# EAGLE board BMS-HVver3 (EAGLE 6.6.0), part 1 of 2
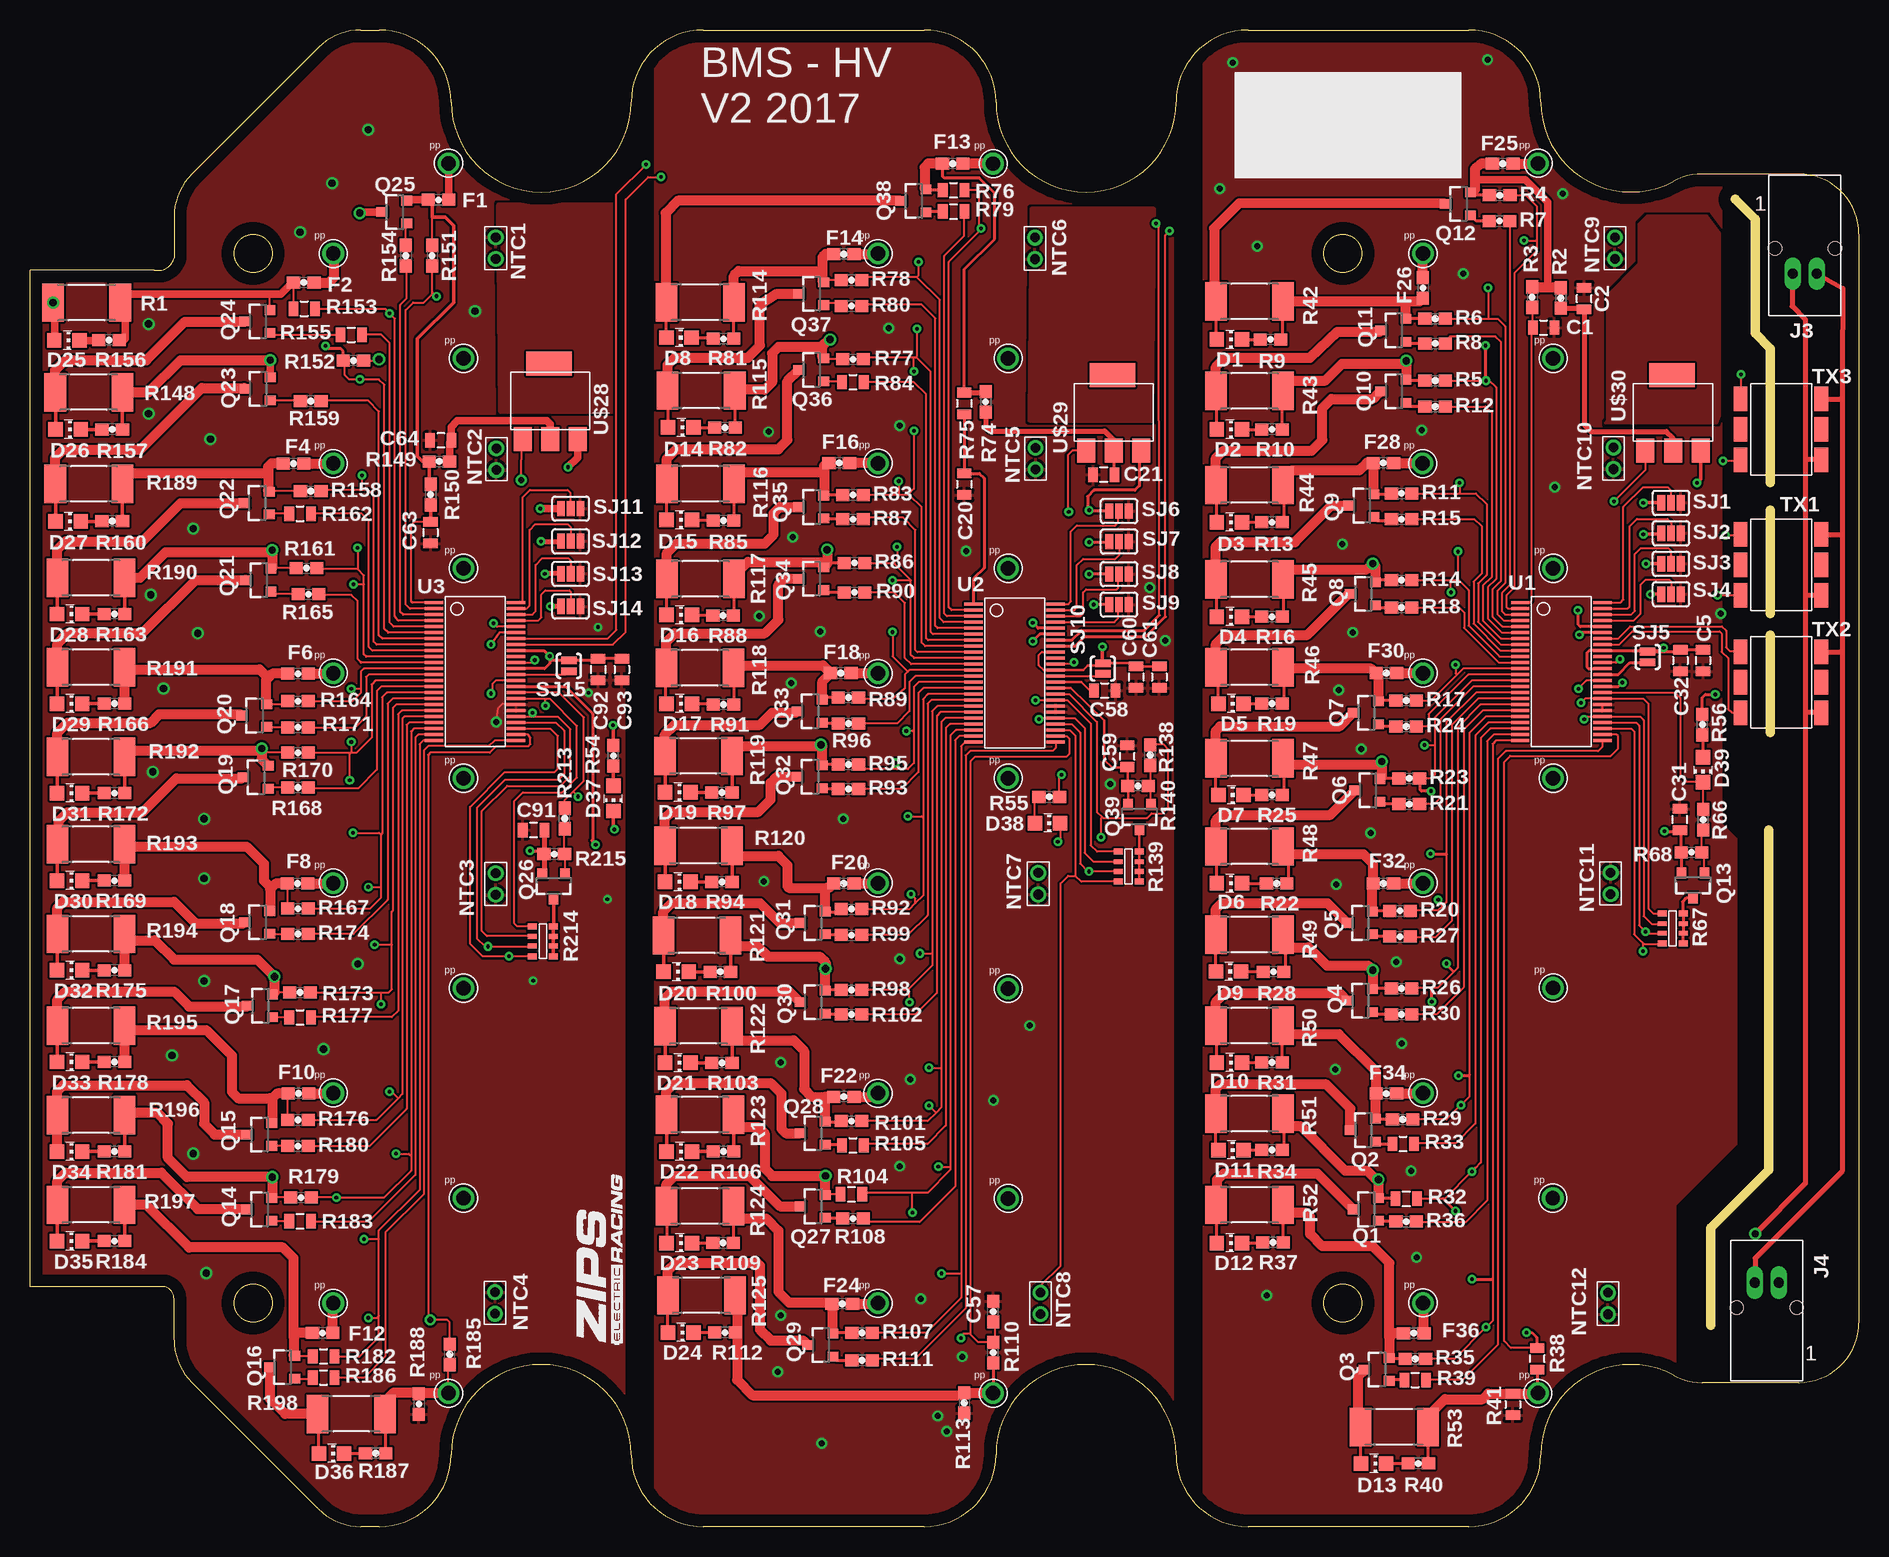
[diagram p0: board, top side]
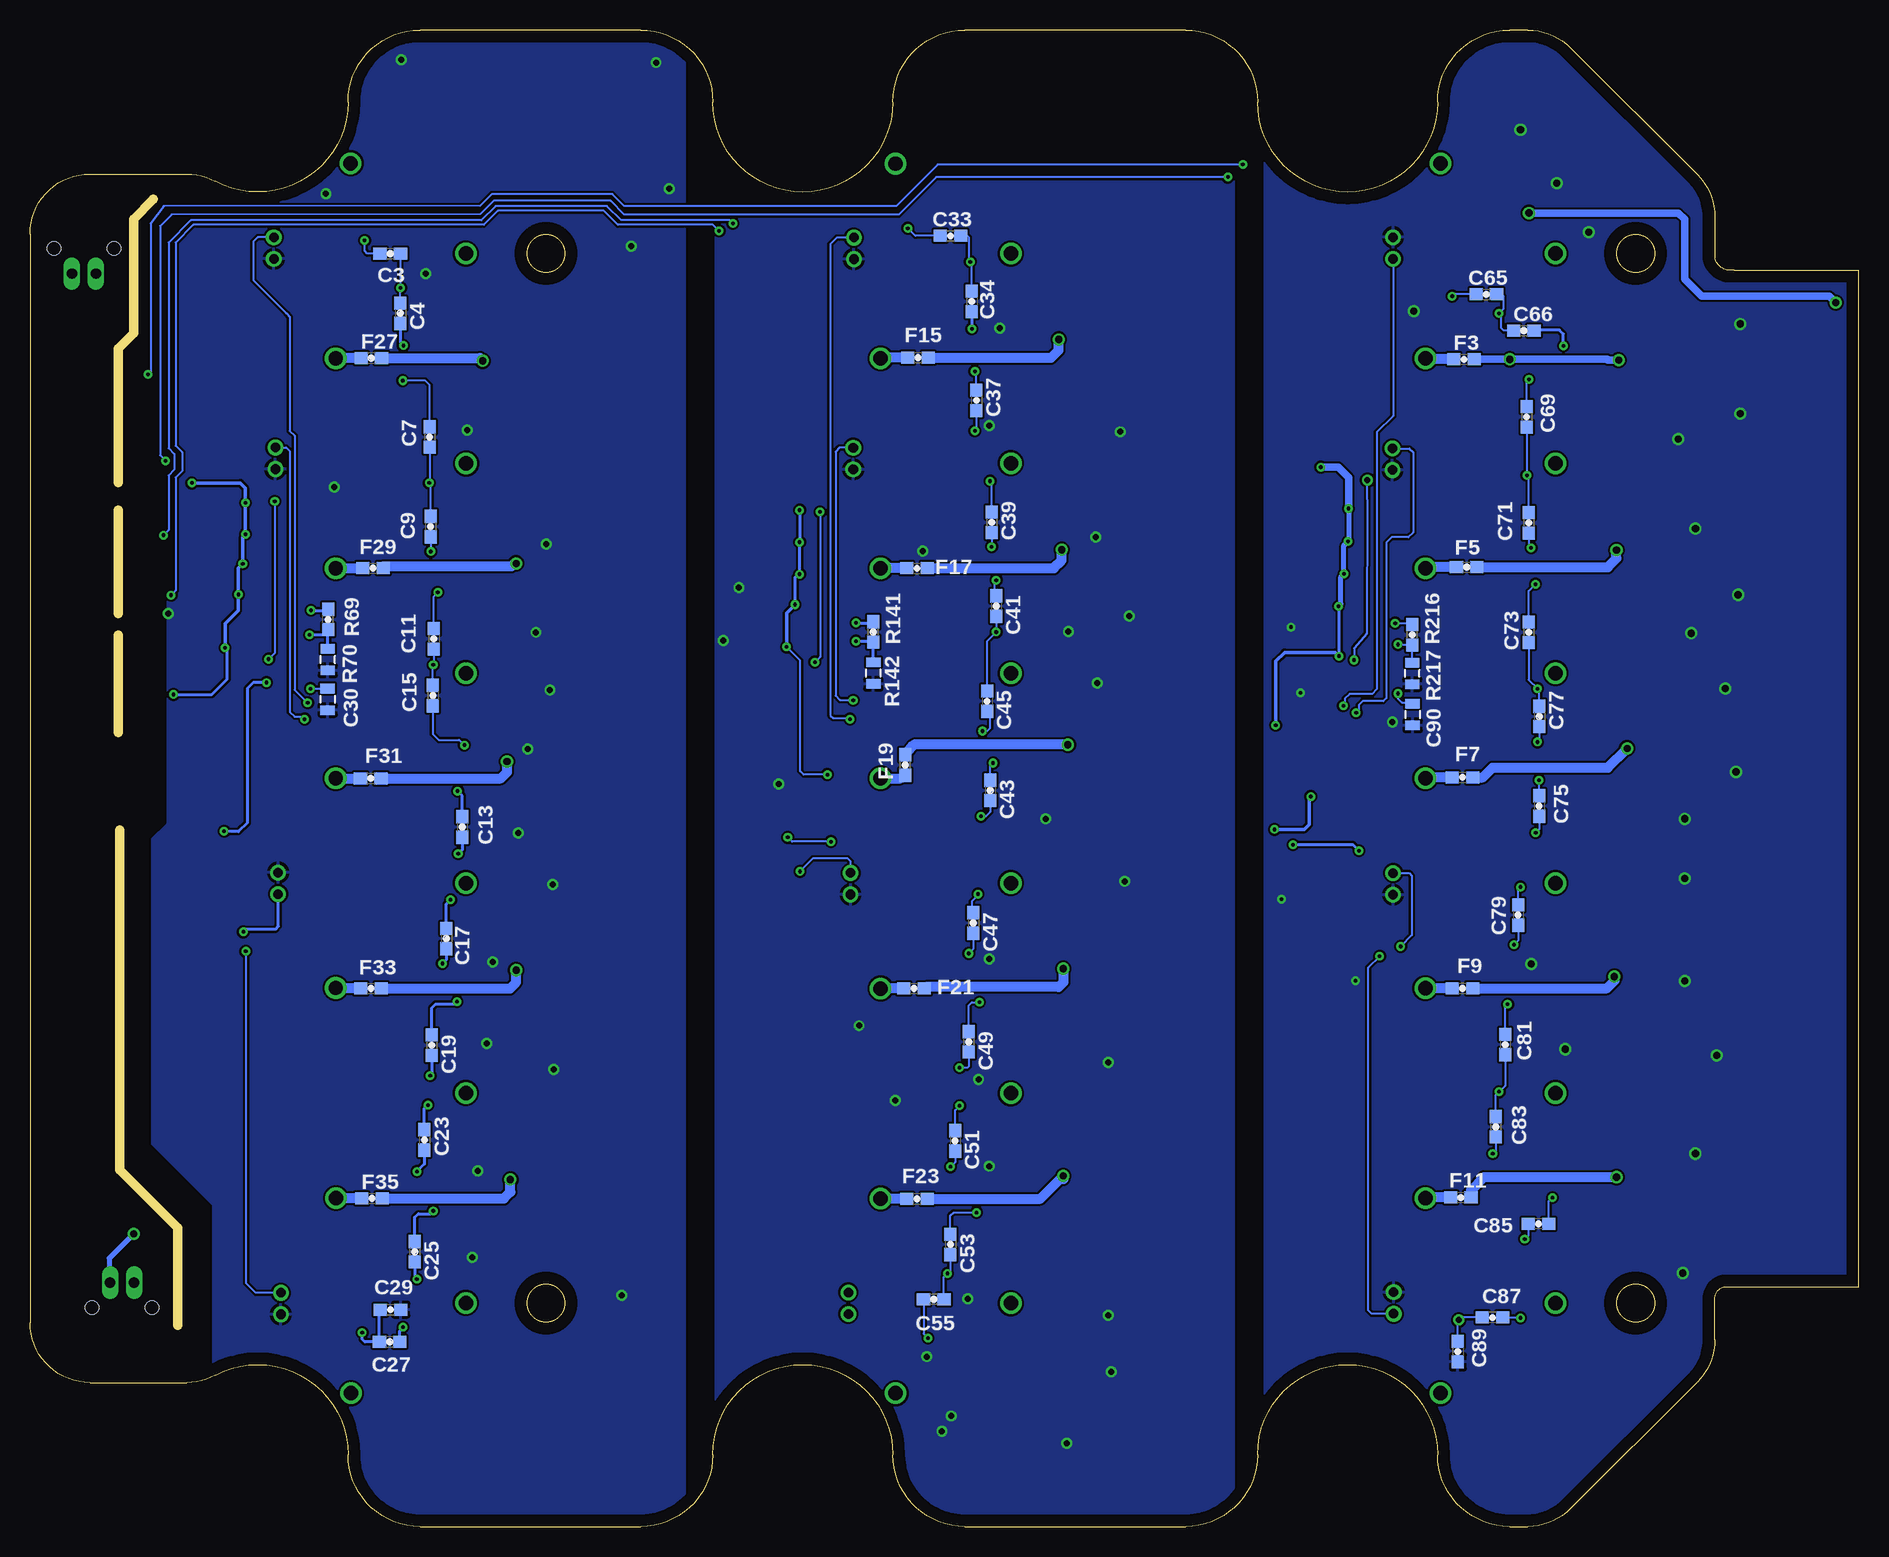
[diagram p1: board, bottom side, seen from below]

Size 152.4 x 124.75 mm. Coordinates in mm from the lower left corner, seen from the top.
Outline: 145.03,87.01 145.03,98.19 143.76,99.46 143.76,108.98 142.11,110.63
Outline: 145.03,84.73 145.03,76.09
Outline: 145.03,74.31 145.03,66.19
Outline: 140.08,16.78 140.08,24.91 144.91,29.74 144.91,58.06
Outline: 152.4,107.75 152.4,17 arc-90 147.4,12 139.34,12 arc-28 136.96,12.6 arc118 125.9,6 arc-90 119.9,0 101.5,0 arc-90 95.5,6 arc180 80.5,6 arc-90 74.5,0 56.1,0 arc-90 50.1,6 arc180 35.1,6 arc-90 29.1,0 27.57,0 arc-45 24.04,1.46 13.46,12.03 arc-45 12,15.57 12,19 arc90 11,20 0,20 0,104.75 10.37,104.75 arc90 12,105.75 12,109.18 arc-45 13.46,112.72 24.04,123.29 arc-45 27.57,124.75 29.1,124.75 arc-90 35.1,118.75 arc180 50.1,118.75 arc-90 56.1,124.75 74.5,124.75 arc-90 80.5,118.75 arc180 95.5,118.75 arc-90 101.5,124.75 119.9,124.75 arc-90 125.9,118.75 arc118 136.96,112.15 arc-28 139.34,112.75 147.4,112.75 arc-90 152.4,107.75
Outline: circle at 109.4,106.12 radius 1.59
Outline: circle at 109.4,18.62 radius 1.59
Outline: circle at 18.6,18.62 radius 1.59
Outline: circle at 18.6,106.12 radius 1.59
Copper layers (1*16): Top 0.035mm / dielectric 1.5mm / Bottom 0.035mm
Design rules "default *": minimum track width 7mil, minimum drill 12mil, track to track 7mil, track to pad 7mil, pad to pad 7mil, via to via 7mil, smd to smd 7mil, copper to edge 40mil, drill to drill 8mil, minimum pad ring 10mil, minimum via ring 8mil, stop-mask expansion 4mil, vias tented up to drill 0mil, thermal gap 10mil

## Footprints (pad centres in the part's own frame; a part is rotated, then mirrored left to right if it is on the bottom)
0805 = smd 0.8 x 1.2: 1 -0.9,0; 2 0.9,0
0603 = smd 1.1 x 1: 1 -0.85,0; 2 0.85,0
CHIP_LED0805 = smd 1.2 x 1.2: A 0,-1.05; C 0,1.05
S02B-PASK-2(LF)(SN) = drill 0.85 long: 1 -1,0; 2 1,0 | hole 1.1: -2.5,2.1; 2.5,2.1
103JT-025 = drill 0.8: 1 -0.9,0; 2 0.9,0
SOT23 = smd 0.8 x 0.9: 1 -0.95,-1; 2 0.95,-1; 3 0,1.1
R2512 = smd 1.8 x 3.2: 1 -2.8,0; 2 2.8,0
MNR14 = smd 0.5 x 0.75: 1 -1.25,-0.9; 4 1.25,-0.9; 5 1.25,0.85; 8 -1.25,0.85 | smd 0.4 x 0.75: 2 -0.4,-0.9; 3 0.4,-0.9; 6 0.4,0.85; 7 -0.4,0.85
PAD-JUMPER-3-NO_YES_SILK = smd 0.635 x 1.27: 1 -0.813,0; 2 0,0; 3 0.813,0
PAD-JUMPER-2-NO_YES_SILK = smd 0.635 x 1.27: 1 -0.45,0; 2 0.45,0
PE-68386NLT = smd 1.143 x 2.032: 1 -3.378,2.54; 2 -3.378,0; 3 -3.378,-2.54; 4 3.353,-2.54; 5 3.353,0; 6 3.353,2.54
SSOP-48 = smd 0.25 x 1.524: 1 -5.75,-3.421; 2 -5.25,-3.421; 3 -4.75,-3.421; 4 -4.25,-3.421; 5 -3.75,-3.421; 6 -3.25,-3.421; 7 -2.75,-3.421; 8 -2.25,-3.421; 9 -1.75,-3.421; 10 -1.25,-3.421; 11 -0.75,-3.421; 12 -0.25,-3.421; 13 0.25,-3.421; 14 0.75,-3.421; 15 1.25,-3.421; 16 1.75,-3.421; 17 2.25,-3.421; 18 2.75,-3.421; 19 3.25,-3.421; 20 3.75,-3.421; 21 4.25,-3.421; 22 4.75,-3.421; 23 5.25,-3.421; 24 5.75,-3.421; 25 5.75,3.421; 26 5.25,3.421; 27 4.75,3.421; 28 4.25,3.421; 29 3.75,3.421; 30 3.25,3.421; 31 2.75,3.421; 32 2.25,3.421; 33 1.75,3.421; 34 1.25,3.421; 35 0.75,3.421; 36 0.25,3.421; 37 -0.25,3.421; 38 -0.75,3.421; 39 -1.25,3.421; 40 -1.75,3.421; 41 -2.25,3.421; 42 -2.75,3.421; 43 -3.25,3.421; 44 -3.75,3.421; 45 -4.25,3.421; 46 -4.75,3.421; 47 -5.25,3.421; 48 -5.75,3.421
POGOPIN = drill 1.2: 1 0,0
SOT223 = smd 1.5 x 2: P$1 0,0; P$2 2.3,0; P$3 4.6,0 | smd 3.8 x 2: P$4 2.2,6.3

## Placement (x,y rotation side)
C1  0.1UF  [0805]  126.14,99.94 0 top
C2  0.1UF  [0805]  129.51,102.35 90 top
C3  10NF  [0603]  122.38,106.11 0 bottom
C4  10NF  [0603]  121.54,101.14 270 bottom
C5  1UF  [0805]  139.42,72.18 270 top
C7  10NF  [0603]  119.1,90.82 270 bottom
C9  10NF  [0603]  119.02,83.36 270 bottom
C11  10NF  [0603]  118.75,74.01 270 bottom
C13  10NF  [0603]  116.38,58.31 270 bottom
C15  10NF  [0603]  118.82,69.27 270 bottom
C17  10NF  [0603]  117.7,49.01 270 bottom
C19  10NF  [0603]  118.92,40.12 270 bottom
C20  0.1UF  [0805]  77.85,86.89 270 top
C21  0.1UF  [0805]  89.48,87.67 180 top
C23  10NF  [0603]  119.53,32.23 270 bottom
C25  10NF  [0603]  120.35,22.9 270 bottom
C27  10NF  [0603]  122.43,15.38 180 bottom
C29  10NF  [0603]  122.35,18.08 0 bottom
C30  1UF  [0805]  127.6,68.95 270 bottom
C31  1UF  [0805]  137.49,58.93 90 top
C32  1UF  [0805]  137.53,72.19 270 top
C33  10NF  [0603]  75.69,107.59 0 bottom
C34  10NF  [0603]  73.91,102.13 270 bottom
C37  10NF  [0603]  73.53,93.87 270 bottom
C39  10NF  [0603]  72.26,83.71 270 bottom
C41  10NF  [0603]  71.88,76.73 270 bottom
C43  10NF  [0603]  72.39,61.36 270 bottom
C45  10NF  [0603]  72.64,68.8 270 bottom
C47  10NF  [0603]  73.79,50.31 270 bottom
C49  10NF  [0603]  74.17,40.4 270 bottom
C51  10NF  [0603]  75.31,32.15 270 bottom
C53  10NF  [0603]  75.69,23.51 270 bottom
C55  10NF  [0603]  77.09,18.94 180 bottom
C57  10NF  [0603]  80.26,17.92 90 top
C58  1UF  [0805]  89.56,69.69 0 top
C59  1UF  [0805]  91.44,64.22 90 top
C60  1UF  [0805]  92.18,70.81 270 top
C61  1UF  [0805]  94.12,70.81 270 top
C63  0.1UF  [0805]  33.38,82.85 270 top
C64  0.1UF  [0805]  34.24,90.54 180 top
C65  10NF  [0603]  31.04,102.71 0 bottom
C66  10NF  [0603]  27.91,99.69 0 bottom
C69  10NF  [0603]  27.69,92.5 270 bottom
C71  10NF  [0603]  27.51,83.66 270 bottom
C73  10NF  [0603]  27.51,74.54 270 bottom
C75  10NF  [0603]  26.64,60.06 270 bottom
C77  10NF  [0603]  26.62,67.53 270 bottom
C79  10NF  [0603]  28.4,50.97 270 bottom
C81  10NF  [0603]  29.46,40.18 270 bottom
C83  10NF  [0603]  30.25,33.32 270 bottom
C85  10NF  [0603]  26.7,25.24 180 bottom
C87  10NF  [0603]  30.53,17.42 180 bottom
C89  10NF  [0603]  33.41,14.58 270 bottom
C90  1UF  [0805]  37.19,67.68 270 bottom
C91  1UF  [0805]  41.96,58.06 180 top
C92  1UF  [0805]  47.35,71.44 270 top
C93  1UF  [0805]  49.33,71.44 270 top
D1  LED_RED  [CHIP_LED0805]  99.95,98.95 270 top
D2  LED_RED  [CHIP_LED0805]  99.95,91.46 270 top
D3  LED_RED  [CHIP_LED0805]  99.95,83.71 270 top
D4  LED_RED  [CHIP_LED0805]  99.95,75.84 270 top
D5  LED_RED  [CHIP_LED0805]  100.08,68.6 270 top
D6  LED_RED  [CHIP_LED0805]  99.95,53.61 270 top
D7  LED_RED  [CHIP_LED0805]  100.08,60.98 270 top
D8  LED_RED  [CHIP_LED0805]  54.08,99.1 270 top
D9  LED_RED  [CHIP_LED0805]  99.87,46.27 270 top
D10  LED_RED  [CHIP_LED0805]  99.95,38.68 270 top
D11  LED_RED  [CHIP_LED0805]  100.08,31.39 270 top
D12  LED_RED  [CHIP_LED0805]  99.95,23.64 270 top
D13  LED_RED  [CHIP_LED0805]  111.96,5.25 270 top
D14  LED_RED  [CHIP_LED0805]  54.23,91.61 270 top
D15  LED_RED  [CHIP_LED0805]  54.1,83.91 270 top
D16  LED_RED  [CHIP_LED0805]  54.1,75.99 270 top
D17  LED_RED  [CHIP_LED0805]  54.1,68.6 270 top
D18  LED_RED  [CHIP_LED0805]  53.98,53.74 270 top
D19  LED_RED  [CHIP_LED0805]  53.98,61.21 270 top
D20  LED_RED  [CHIP_LED0805]  53.85,46.25 270 top
D21  LED_RED  [CHIP_LED0805]  53.98,38.65 270 top
D22  LED_RED  [CHIP_LED0805]  54.1,31.26 270 top
D23  LED_RED  [CHIP_LED0805]  54.1,23.64 270 top
D24  LED_RED  [CHIP_LED0805]  54.23,16.17 270 top
D25  LED_RED  [CHIP_LED0805]  3.07,98.87 270 top
D26  LED_RED  [CHIP_LED0805]  3.17,91.46 270 top
D27  LED_RED  [CHIP_LED0805]  3.17,83.79 270 top
D28  LED_RED  [CHIP_LED0805]  3.3,76.07 270 top
D29  LED_RED  [CHIP_LED0805]  3.3,68.6 270 top
D30  LED_RED  [CHIP_LED0805]  3.3,53.84 270 top
D31  LED_RED  [CHIP_LED0805]  3.3,61.13 270 top
D32  LED_RED  [CHIP_LED0805]  3.3,46.37 270 top
D33  LED_RED  [CHIP_LED0805]  3.3,38.73 270 top
D34  LED_RED  [CHIP_LED0805]  3.3,31.26 270 top
D35  LED_RED  [CHIP_LED0805]  3.3,23.79 270 top
D36  LED_RED  [CHIP_LED0805]  25.12,6.09 270 top
D37  LED_AMBER  [CHIP_LED0805]  48.62,60.7 180 top
D38  LED_AMBER  [CHIP_LED0805]  84.79,58.64 270 top
D39  LED_AMBER  [CHIP_LED0805]  139.42,63.09 180 top
F1  FUSE_750MA_63V_0603  [0603]  34.04,110.58 180 top
F2  FUSE_750MA_63V_0603  [0603]  22.81,103.7 180 top
F3  FUSE_750MA_63V_0603  [0603]  32.89,97.3 0 bottom
F4  FUSE_750MA_63V_0603  [0603]  21.96,88.61 180 top
F5  FUSE_750MA_63V_0603  [0603]  32.68,79.98 0 bottom
F6  FUSE_750MA_63V_0603  [0603]  22.33,71.09 180 top
F7  FUSE_750MA_63V_0603  [0603]  33.03,62.45 0 bottom
F8  FUSE_750MA_63V_0603  [0603]  22.29,53.6 180 top
F9  FUSE_750MA_63V_0603  [0603]  33.03,44.86 0 bottom
F10  FUSE_750MA_63V_0603  [0603]  22.38,36.1 180 top
F11  FUSE_750MA_63V_0603  [0603]  33.16,27.42 0 bottom
F12  FUSE_750MA_63V_0603  [0603]  24.38,16.13 180 top
F13  FUSE_750MA_63V_0603  [0603]  76.89,113.61 180 top
F14  FUSE_750MA_63V_0603  [0603]  67.82,106.06 180 top
F15  FUSE_750MA_63V_0603  [0603]  78.4,97.43 0 bottom
F16  FUSE_750MA_63V_0603  [0603]  67.44,88.66 180 top
F17  FUSE_750MA_63V_0603  [0603]  78.49,79.88 0 bottom
F18  FUSE_750MA_63V_0603  [0603]  67.56,71.14 180 top
F19  FUSE_750MA_63V_0603  [0603]  79.46,63.48 90 bottom
F20  FUSE_750MA_63V_0603  [0603]  67.82,53.61 180 top
F21  FUSE_750MA_63V_0603  [0603]  78.74,44.85 0 bottom
F22  FUSE_750MA_63V_0603  [0603]  67.82,35.83 180 top
F23  FUSE_750MA_63V_0603  [0603]  78.49,27.32 0 bottom
F24  FUSE_750MA_63V_0603  [0603]  67.69,18.56 180 top
F25  FUSE_750MA_63V_0603  [0603]  122.73,113.61 180 top
F26  FUSE_750MA_63V_0603  [0603]  116.08,103.24 270 top
F27  FUSE_750MA_63V_0603  [0603]  123.95,97.4 0 bottom
F28  FUSE_750MA_63V_0603  [0603]  112.78,88.66 180 top
F29  FUSE_750MA_63V_0603  [0603]  123.83,79.9 0 bottom
F30  FUSE_750MA_63V_0603  [0603]  113.03,71.14 180 top
F31  FUSE_750MA_63V_0603  [0603]  124,62.38 0 bottom
F32  FUSE_750MA_63V_0603  [0603]  112.78,53.61 180 top
F33  FUSE_750MA_63V_0603  [0603]  123.99,44.85 0 bottom
F34  FUSE_750MA_63V_0603  [0603]  113.03,36.09 180 top
F35  FUSE_750MA_63V_0603  [0603]  123.9,27.35 0 bottom
F36  FUSE_750MA_63V_0603  [0603]  115.32,16.12 180 top
J3  M2S02B-PASK-2(LF)(SN)  [S02B-PASK-2(LF)(SN)]  147.9,104.44 0 top
J4  M2S02B-PASK-2(LF)(SN)  [S02B-PASK-2(LF)(SN)]  144.73,20.34 180 top
NTC1  103JT-025  [103JT-025]  38.81,106.57 270 top
NTC2  103JT-025  [103JT-025]  38.86,88.97 90 top
NTC3  103JT-025  [103JT-025]  38.81,53.56 90 top
NTC4  103JT-025  [103JT-025]  38.76,18.64 270 top
NTC5  103JT-025  [103JT-025]  83.79,89.02 90 top
NTC6  103JT-025  [103JT-025]  83.74,106.55 90 top
NTC7  103JT-025  [103JT-025]  84.02,53.59 90 top
NTC8  103JT-025  [103JT-025]  84.2,18.61 90 top
NTC9  103JT-025  [103JT-025]  132.08,106.57 90 top
NTC10  103JT-025  [103JT-025]  131.95,89.05 90 top
NTC11  103JT-025  [103JT-025]  131.72,53.61 270 top
NTC12  103JT-025  [103JT-025]  131.5,18.59 90 top
Q1  BSS308PE  [SOT23]  111.38,26.43 90 top
Q2  BSS308PE  [SOT23]  111.12,33.04 90 top
Q3  BSS308PE  [SOT23]  112.27,13.1 90 top
Q4  BSS308PE  [SOT23]  110.87,43.83 90 top
Q5  BSS308PE  [SOT23]  110.87,50.31 90 top
Q6  BSS308PE  [SOT23]  111.51,61.36 90 top
Q7  BSS308PE  [SOT23]  111.38,67.84 90 top
Q8  BSS308PE  [SOT23]  111.12,77.74 90 top
Q9  BSS308PE  [SOT23]  111,85.11 90 top
Q10  BSS308PE  [SOT23]  113.67,94.63 90 top
Q11  BSS308PE  [SOT23]  113.67,99.71 90 top
Q12  BSS308PE  [SOT23]  119.05,110.25 90 top
Q13  BSS308PE  [SOT23]  138.58,53.48 180 top
Q14  BSS308PE  [SOT23]  19.15,26.43 90 top
Q15  BSS308PE  [SOT23]  19.15,32.68 90 top
Q16  BSS308PE  [SOT23]  21.06,13.28 90 top
Q17  BSS308PE  [SOT23]  19.2,43.4 90 top
Q18  BSS308PE  [SOT23]  18.97,50.36 90 top
Q19  BSS308PE  [SOT23]  18.85,62.45 90 top
Q20  BSS308PE  [SOT23]  18.72,67.61 90 top
Q21  BSS308PE  [SOT23]  19.08,78.89 90 top
Q22  BSS308PE  [SOT23]  18.95,85.31 90 top
Q23  BSS308PE  [SOT23]  19.02,94.84 90 top
Q24  BSS308PE  [SOT23]  19,100.45 90 top
Q25  BSS308PE  [SOT23]  30.4,109.57 90 top
Q26  BSS308PE  [SOT23]  43.64,53.41 180 top
Q27  BSS308PE  [SOT23]  65.28,26.69 90 top
Q28  BSS308PE  [SOT23]  65.28,32.78 90 top
Q29  BSS308PE  [SOT23]  65.91,15.13 90 top
Q30  BSS308PE  [SOT23]  65.28,43.71 90 top
Q31  BSS308PE  [SOT23]  65.28,50.31 90 top
Q32  BSS308PE  [SOT23]  65.02,62.5 90 top
Q33  BSS308PE  [SOT23]  65.02,67.96 90 top
Q34  BSS308PE  [SOT23]  65.15,79.01 90 top
Q35  BSS308PE  [SOT23]  65.15,84.98 90 top
Q36  BSS308PE  [SOT23]  65.15,96.41 90 top
Q37  BSS308PE  [SOT23]  65.15,102.76 90 top
Q38  BSS308PE  [SOT23]  73.66,110.51 90 top
Q39  BSS308PE  [SOT23]  92.46,59.2 180 top
R1  [R2512]  4.72,102.02 180 top
R2  100  [0603]  127.56,102.41 270 top
R3  100  [0603]  125.17,102.48 270 top
R4  100  [0603]  122.48,110.97 0 top
R5  100  [0603]  117.09,95.52 0 top
R6  100  [0603]  117.09,100.68 0 top
R7  3.3K  [0603]  122.45,108.83 0 top
R8  3.3K  [0603]  117.09,98.62 0 top
R9  475  [0603]  103.38,98.95 180 top
R10  475  [0603]  103.5,91.46 180 top
R11  100  [0603]  114.3,86.12 0 top
R12  3.3K  [0603]  117.09,93.36 0 top
R13  475  [0603]  103.5,83.71 180 top
R14  100  [0603]  114.3,78.89 0 top
R15  3.3K  [0603]  114.3,83.97 0 top
R16  475  [0603]  103.5,75.84 180 top
R17  100  [0603]  114.68,68.85 0 top
R18  3.3K  [0603]  114.3,76.6 0 top
R19  475  [0603]  103.5,68.6 180 top
R20  100  [0603]  114.17,51.33 0 top
R21  3.3K  [0603]  114.94,60.22 0 top
R22  475  [0603]  103.89,53.61 180 top
R23  100  [0603]  114.94,62.38 0 top
R24  3.3K  [0603]  114.68,66.69 0 top
R25  475  [0603]  103.5,60.98 180 top
R26  100  [0603]  114.3,44.85 0 top
R27  3.3K  [0603]  114.17,49.17 0 top
R28  475  [0603]  103.63,46.25 180 top
R29  100  [0603]  114.39,33.93 0 top
R30  3.3K  [0603]  114.3,42.69 0 top
R31  475  [0603]  103.5,38.68 180 top
R32  100  [0805]  114.68,27.32 0 top
R33  3.3K  [0805]  114.43,31.89 0 top
R34  475  [0603]  103.5,31.39 180 top
R35  100  [0603]  115.44,13.99 0 top
R36  3.3K  [0603]  114.68,25.42 0 top
R37  475  [0603]  103.58,23.69 180 top
R38  100  [0805]  125.6,13.99 90 top
R39  3.3K  [0805]  115.44,12.21 0 top
R40  475  [0603]  115.7,5.25 180 top
R41  0  [0805]  123.57,10.18 270 top
R42  [R2512]  101.63,102.13 180 top
R43  [R2512]  101.63,94.66 180 top
R44  [R2512]  101.63,86.81 180 top
R45  [R2512]  101.63,78.96 180 top
R46  [R2512]  101.63,71.62 180 top
R47  [R2512]  101.63,64.03 180 top
R48  [R2512]  101.63,56.69 180 top
R49  [R2512]  101.63,49.34 180 top
R50  [R2512]  101.63,41.75 180 top
R51  [R2512]  101.63,34.41 180 top
R52  [R2512]  101.63,26.81 180 top
R53  [R2512]  113.69,8.3 180 top
R54  1k  [0603]  48.62,64.25 90 top
R55  1k  [0603]  84.94,60.83 0 top
R56  1k  [0603]  139.37,66.85 90 top
R66  1K  [0603]  139.45,58.92 90 top
R67  10K  [MNR14]  136.91,49.85 270 top
R68  100K  [0603]  138.46,56.2 180 top
R69  1.2K  [0603]  127.56,75.61 90 bottom
R70  787  [0805]  127.58,72.27 90 bottom
R74  100  [0603]  79.63,93.74 270 top
R75  100  [0805]  77.85,93.62 270 top
R76  100  [0805]  76.96,111.4 0 top
R77  100  [0603]  68.58,97.3 0 top
R78  100  [0603]  68.45,103.9 0 top
R79  3.3K  [0805]  76.96,109.62 0 top
R80  3.3K  [0603]  68.45,101.75 0 top
R81  475  [0603]  57.79,99 180 top
R82  475  [0603]  57.91,91.61 180 top
R83  100  [0603]  68.58,86 0 top
R84  3.3K  [0805]  68.58,95.4 0 top
R85  475  [0603]  57.79,83.86 180 top
R86  100  [0603]  68.71,80.33 0 top
R87  3.3K  [0603]  68.58,83.97 0 top
R88  475  [0603]  57.76,75.94 180 top
R89  100  [0603]  68.2,69.11 0 top
R90  3.3K  [0603]  68.71,77.87 0 top
R91  475  [0603]  57.79,68.52 180 top
R92  100  [0603]  68.45,51.48 0 top
R93  3.3K  [0603]  68.2,61.49 0 top
R94  475  [0603]  57.66,53.74 180 top
R95  100  [0603]  68.2,63.52 0 top
R96  3.3K  [0603]  68.2,66.95 0 top
R97  475  [0603]  57.66,61.18 180 top
R98  100  [0603]  68.45,44.72 0 top
R99  3.3K  [0603]  68.45,49.29 0 top
R100  475  [0603]  57.53,46.25 180 top
R101  100  [0603]  68.45,33.8 0 top
R102  3.3K  [0603]  68.45,42.69 0 top
R103  475  [0603]  57.66,38.65 180 top
R104  100  [0805]  68.45,27.7 0 top
R105  3.3K  [0805]  68.58,31.77 0 top
R106  475  [0603]  57.79,31.26 180 top
R107  100  [0603]  69.34,16.15 0 top
R108  3.3K  [0603]  68.58,25.67 0 top
R109  475  [0603]  57.76,23.64 180 top
R110  100  [0603]  80.26,14.5 90 top
R111  3.3K  [0603]  69.34,13.86 0 top
R112  475  [0603]  57.91,16.17 180 top
R113  0  [0603]  77.85,10.3 270 top
R114  [R2512]  55.85,102.05 180 top
R115  [R2512]  55.93,94.68 180 top
R116  [R2512]  55.88,86.91 180 top
R117  [R2512]  55.88,78.99 180 top
R118  [R2512]  55.83,71.57 180 top
R119  [R2512]  55.7,64.23 180 top
R120  [R2512]  55.7,56.76 180 top
R121  [R2512]  55.58,49.27 180 top
R122  [R2512]  55.7,41.72 180 top
R123  [R2512]  55.83,34.33 180 top
R124  [R2512]  55.83,26.71 180 top
R125  [R2512]  55.96,19.27 180 top
R138  1K  [0603]  93.34,64.31 90 top
R139  10K  [MNR14]  91.57,55.01 270 top
R140  100K  [0603]  92.33,61.74 180 top
R141  1.2K  [0603]  82.12,74.57 90 bottom
R142  787  [0805]  82.12,71.14 90 bottom
R148  [R2512]  4.9,94.56 180 top
R149  100  [0603]  34.11,88.79 0 top
R150  100  [0603]  33.38,86.02 270 top
R151  100  [0603]  33.5,105.94 270 top
R152  100  [0603]  26.95,97.2 180 top
R153  100  [0805]  22.86,101.52 0 top
R154  3.3K  [0603]  31.32,105.94 270 top
R155  3.3K  [0805]  26.77,99.33 0 top
R156  475  [0603]  6.58,98.9 180 top
R157  475  [0603]  6.86,91.46 180 top
R158  100  [0603]  23.39,86.3 0 top
R159  3.3K  [0603]  23.39,93.82 0 top
R160  475  [0603]  6.86,83.81 180 top
R161  100  [0603]  23.04,79.9 0 top
R162  3.3K  [0805]  22.5,84.42 0 top
R163  475  [0603]  7.04,76.07 180 top
R164  100  [0603]  22.33,68.8 0 top
R165  3.3K  [0603]  23.22,77.72 0 top
R166  475  [0603]  7.04,68.6 180 top
R167  100  [0603]  22.33,51.5 0 top
R168  3.3K  [0603]  22.33,61.61 0 top
R169  475  [0603]  7.04,53.84 180 top
R170  100  [0603]  22.33,64.51 0 top
R171  3.3K  [0603]  22.33,66.62 0 top
R172  475  [0603]  7.04,61.13 180 top
R173  100  [0603]  22.5,44.52 0 top
R174  3.3K  [0603]  22.33,49.4 0 top
R175  475  [0603]  7.04,46.37 180 top
R176  100  [0603]  22.33,33.9 0 top
R177  3.3K  [0805]  22.5,42.44 0 top
R178  475  [0603]  7.04,38.73 180 top
R179  100  [0603]  22.58,27.42 0 top
R180  3.3K  [0603]  22.33,31.72 0 top
R181  475  [0603]  7.04,31.26 180 top
R182  100  [0805]  24.46,14.19 0 top
R183  3.3K  [0805]  22.5,25.44 0 top
R184  475  [0603]  7.04,23.79 180 top
R185  100  [0603]  34.98,14.34 90 top
R186  3.3K  [0805]  24.46,12.41 0 top
R187  475  [0603]  28.8,6.11 180 top
R188  0  [0603]  32.41,10.2 270 top
R189  [R2512]  4.9,86.91 180 top
R190  [R2512]  5.08,79.09 180 top
R191  [R2512]  5.08,71.62 180 top
R192  [R2512]  5.08,64.15 180 top
R193  [R2512]  5.08,56.86 180 top
R194  [R2512]  5.08,49.4 180 top
R195  [R2512]  5.08,41.75 180 top
R196  [R2512]  5.08,34.28 180 top
R197  [R2512]  5.08,26.81 180 top
R198  [R2512]  26.77,9.39 180 top
R213  1K  [0603]  44.55,59.02 90 top
R214  10K  [MNR14]  42.77,48.79 270 top
R215  100K  [0603]  43.69,56.05 180 top
R216  1.2K  [0603]  37.21,74.34 90 bottom
R217  787  [0805]  37.21,71.11 90 bottom
SJ1  [PAD-JUMPER-3-NO_YES_SILK]  136.75,85.34 0 top
SJ2  [PAD-JUMPER-3-NO_YES_SILK]  136.75,82.8 0 top
SJ3  [PAD-JUMPER-3-NO_YES_SILK]  136.75,80.26 0 top
SJ4  [PAD-JUMPER-3-NO_YES_SILK]  136.75,77.72 0 top
SJ5  [PAD-JUMPER-2-NO_YES_SILK]  134.8,72.48 90 top
SJ6  [PAD-JUMPER-3-NO_YES_SILK]  90.75,84.65 0 top
SJ7  [PAD-JUMPER-3-NO_YES_SILK]  90.75,82.11 0 top
SJ8  [PAD-JUMPER-3-NO_YES_SILK]  90.75,79.39 0 top
SJ9  [PAD-JUMPER-3-NO_YES_SILK]  90.75,76.85 0 top
SJ10  [PAD-JUMPER-2-NO_YES_SILK]  89.41,71.52 90 top
SJ11  [PAD-JUMPER-3-NO_YES_SILK]  45.06,84.85 0 top
SJ12  [PAD-JUMPER-3-NO_YES_SILK]  45.06,82.14 0 top
SJ13  [PAD-JUMPER-3-NO_YES_SILK]  45.06,79.42 0 top
SJ14  [PAD-JUMPER-3-NO_YES_SILK]  45.06,76.7 0 top
SJ15  [PAD-JUMPER-2-NO_YES_SILK]  44.91,71.75 90 top
TX1  PE-68386NLT  [PE-68386NLT]  145.92,80.16 0 top
TX2  PE-68386NLT  [PE-68386NLT]  145.92,70.38 0 top
TX3  PE-68386NLT  [PE-68386NLT]  145.92,91.46 0 top
U1  LTC6804-2  [SSOP-48]  127.61,71.27 270 top
U2  LTC6804-2  [SSOP-48]  82.04,71.14 270 top
U3  LTC6804-2  [SSOP-48]  37.08,71.27 270 top
U$1  POGOPIN  [POGOPIN]  125.65,11.12 0 top
U$2  POGOPIN  [POGOPIN]  116.08,18.64 0 top
U$3  POGOPIN  [POGOPIN]  126.9,27.37 0 top
U$4  POGOPIN  [POGOPIN]  116.08,36.14 0 top
U$5  POGOPIN  [POGOPIN]  126.92,44.9 0 top
U$6  POGOPIN  [POGOPIN]  116.08,53.64 0 top
U$7  POGOPIN  [POGOPIN]  126.92,62.38 0 top
U$8  POGOPIN  [POGOPIN]  116.08,71.14 0 top
U$9  POGOPIN  [POGOPIN]  126.92,79.88 0 top
U$10  POGOPIN  [POGOPIN]  116.05,88.61 0 top
U$11  POGOPIN  [POGOPIN]  126.92,97.38 0 top
U$12  POGOPIN  [POGOPIN]  116.08,106.11 0 top
U$13  POGOPIN  [POGOPIN]  125.68,113.63 0 top
U$14  POGOPIN  [POGOPIN]  34.87,11.12 0 top
U$15  POGOPIN  [POGOPIN]  25.27,18.61 0 top
U$16  POGOPIN  [POGOPIN]  36.12,27.37 0 top
U$17  POGOPIN  [POGOPIN]  25.27,36.14 0 top
U$18  POGOPIN  [POGOPIN]  36.12,44.87 0 top
U$19  POGOPIN  [POGOPIN]  25.27,53.64 0 top
U$20  POGOPIN  [POGOPIN]  36.12,62.38 0 top
U$21  POGOPIN  [POGOPIN]  25.27,71.14 0 top
U$22  POGOPIN  [POGOPIN]  36.12,79.88 0 top
U$23  POGOPIN  [POGOPIN]  25.27,88.61 0 top
U$24  POGOPIN  [POGOPIN]  36.12,97.38 0 top
U$25  POGOPIN  [POGOPIN]  25.27,106.11 0 top
U$26  POGOPIN  [POGOPIN]  34.87,113.63 0 top
U$27  LOGO16-2-L  [2016-2-LOGO-L]  49.5,15.08 90 top
U$28  NSV1C201MZ4T1G  [SOT223]  41.05,90.65 0 top
U$29  NSV1C201MZ4T1G  [SOT223]  88.01,89.68 0 top
U$30  NSV1C201MZ4T1G  [SOT223]  134.62,89.68 0 top
U$40  POGOPIN  [POGOPIN]  80.26,11.12 0 top
U$41  POGOPIN  [POGOPIN]  70.66,18.61 0 top
U$42  POGOPIN  [POGOPIN]  81.51,27.35 0 top
U$43  POGOPIN  [POGOPIN]  70.66,36.11 0 top
U$44  POGOPIN  [POGOPIN]  81.51,44.85 0 top
U$45  POGOPIN  [POGOPIN]  70.66,53.64 0 top
U$46  POGOPIN  [POGOPIN]  81.51,62.38 0 top
U$47  POGOPIN  [POGOPIN]  70.66,71.11 0 top
U$48  POGOPIN  [POGOPIN]  81.51,79.88 0 top
U$49  POGOPIN  [POGOPIN]  70.66,88.64 0 top
U$50  POGOPIN  [POGOPIN]  81.51,97.38 0 top
U$51  POGOPIN  [POGOPIN]  70.66,106.11 0 top
U$52  POGOPIN  [POGOPIN]  80.26,113.61 0 top

## Library data of the parts
C1 C2 C20 C21 C63 C64 = FSAE Electric; PARTNO: CL21B104KCC5PNC
C3 C4 C7 C9 C11 C13 C15 C17 C19 C23 C25 C27 C29 C33 C34 C37 C39 C41 C43 C45 C47 C49 C51 C53 C55 C57 C65 C66 C69 C71 C73 C75 C77 C79 C81 C83 C85 C87 C89 = FSAE Electric; PARTNO: CL10B103KC8NNNC
C5 C30-C32 C58-C61 C90-C93 = FSAE Electric; PARTNO: UMK212F105ZG-T
D1-D36 = FSAE Electric; PARTNO: LH R974-LP-1
D37-D39 = FSAE Electric; PARTNO: HSMA-C170
F1-F36 = FSAE Electric; PARTNO: C2Q 750
J3 J4 = FSAE Electric; PARTNO: S02B-PASK-2(LF)(SN)
NTC1-NTC12 U$1-U$26 U$40-U$52 = FSAE Electric
Q1-Q39 = FSAE Electric; PARTNO: BSS308PE H6327
R1 R42-R53 R114-R125 R148 R189-R198 = adafruit
R2-R6 R11 R14 R17 R20 R23 R26 R29 R35 R74 R77 R78 R83 R86 R89 R92 R95 R98 R101 R107 R110 R149-R152 R158 R161 R164 R167 R170 R173 R176 R179 R185 = FSAE Electric; PARTNO: RC0603FR-07100RL
R7 R8 R12 R15 R18 R21 R24 R27 R30 R36 R80 R87 R90 R93 R96 R99 R102 R108 R111 R154 R159 R165 R168 R171 R174 R180 = FSAE Electric; PARTNO: RC0603JR-073K3L
R9 R10 R13 R16 R19 R22 R25 R28 R31 R34 R37 R40 R81 R82 R85 R88 R91 R94 R97 R100 R103 R106 R109 R112 R156 R157 R160 R163 R166 R169 R172 R175 R178 R181 R184 R187 = FSAE Electric; PARTNO: CRCW0201475RFKED
R32 R38 R75 R76 R104 R153 R182 = FSAE Electric; PARTNO: RC0805FR-07100RL
R33 R39 R79 R84 R105 R155 R162 R177 R183 R186 = FSAE Electric; PARTNO: RC0805FR-073K3L
R41 = FSAE Electric; PARTNO: RC0805JR-070RL
R54-R56 R66 R138 R213 = FSAE Electric; PARTNO: RC0603JR-071KL
R67 R139 R214 = FSAE Electric; PARTNO: MNR14ERAPJ103
R68 R140 R215 = FSAE Electric; PARTNO: RC0603JR-07100KL
R69 R141 R216 = FSAE Electric; PARTNO: RC0603JR-071K2L
R70 R142 R217 = FSAE Electric; PARTNO: RC0805FR-07787RL
R113 R188 = FSAE Electric; PARTNO: CRCW06030000Z0EA
SJ1-SJ15 = SparkFun-Passives
TX1-TX3 = FSAE Electric; PARTNO: PE-68386NLT
U1-U3 = FSAE Electric; PARTNO: LTC6804IG-2#PBF
U$27 = Pic
U$28-U$30 = FSAE Electric; PARTNO: NSV1C201MZ4T1G

## Nets
A0: SJ9.2 U2.45
A1: SJ8.2 U2.46
A2: SJ7.2 U2.47
A3: SJ6.2 U2.48
A4: SJ4.2 U1.45
A5: SJ3.2 U1.46
A6: SJ2.2 U1.47
A7: SJ1.2 U1.48
A8: SJ14.2 U3.45
A9: SJ13.2 U3.46
A10: SJ12.2 U3.47
A11: SJ11.2 U3.48
C0: C55.2 C57.1 R110.2 U2.26
C1: C53.2 C55.1 R107.2 U2.24
C2: C51.2 C53.1 R104.2 U2.22
C3: C49.2 C51.1 R101.2 U2.20
C4: C47.2 C49.1 R98.2 U2.18
C5: C43.2 C47.1 R92.2 U2.16
C6: C43.1 C45.2 R95.2 U2.14
C7: C41.2 C45.1 R89.2 U2.12
C8: C39.2 C41.1 R86.2 U2.10
C9: C37.2 C39.1 R83.2 U2.8
C10: C34.2 C37.1 R77.2 U2.6
C11: C33.2 C34.1 R78.2 U2.4
C12: C33.1 R76.2 U2.2
C13: C3.1 R4.2 U1.2
C14: C3.2 C4.1 R6.2 U1.4
C15: C7.2 C9.1 R11.2 U1.8
C16: C11.2 C15.1 R17.2 U1.12
C17: C13.1 C15.2 R23.2 U1.14
C18: C13.2 C17.1 R20.2 U1.16
C19: C19.2 C23.1 R29.2 U1.20
C20: C23.2 C25.1 R32.2 U1.22
C21: C25.2 C27.1 R35.2 U1.24
C22: C4.2 C7.1 R5.2 U1.6
C23: C27.2 C29.1 R38.2 U1.26
C24: C17.2 C19.1 R26.2 U1.18
C25: C9.2 C11.1 R14.2 U1.10
C26: C65.1 R151.2 U3.2
C27: C65.2 C66.1 R153.2 U3.4
C28: C69.2 C71.1 R158.2 U3.8
C29: C73.2 C77.1 R164.2 U3.12
C30: C75.1 C77.2 R170.2 U3.14
C31: C75.2 C79.1 R167.2 U3.16
C32: C81.2 C83.1 R176.2 U3.20
C33: C83.2 C85.1 R179.2 U3.22
C34: C85.2 C87.1 R182.2 U3.24
C35: C66.2 C69.1 R152.2 U3.6
C36: C87.2 C89.1 R185.2 U3.26
C37: C79.2 C81.1 R173.2 U3.18
C38: C71.2 C73.1 R161.2 U3.10
DRIVE: U2.38 U$29.P$1
DRIVE1: U1.38 U$30.P$1
DRIVE2: U3.38 U$28.P$1
GND: C63.2 C64.2 C89.2 C90.2 C91.2 C92.2 C93.2 NTC1.1 NTC2.1 NTC3.1 NTC4.1 R188.2 R217.1 SJ11.3 SJ12.3 SJ13.3 SJ14.3 U3.30 U3.31
GNDA: C20.2 C21.2 C57.2 C58.2 C59.2 C60.2 C61.2 NTC5.1 NTC6.1 NTC7.1 R113.2 R142.1 SJ6.3 SJ7.3 SJ8.3 SJ9.3 U2.30 U2.31
GNDI: C1.2 C2.2 C5.2 C29.2 C30.2 C31.2 C32.2 NTC9.1 NTC10.1 NTC11.1 NTC12.1 R41.2 R70.1 SJ1.3 SJ2.3 SJ3.3 SJ4.3 U1.30 U1.31
GPIO1: NTC8.2 R139.4 U2.27
GPIO2: NTC7.2 R139.3 U2.28
GPIO3: NTC6.2 R139.2 U2.29
GPIO4: NTC5.2 R139.1 U2.32
GPIO5: D38.C R138.2 U2.33
GPIO6: NTC10.2 R67.2 U1.29
GPIO7: NTC9.2 R67.1 U1.32
GPIO8: NTC12.2 R67.4 U1.27
GPIO9: NTC11.2 R67.3 U1.28
GPIO10: D39.C R66.2 U1.33
GPIO11: NTC2.2 R214.2 U3.29
GPIO12: NTC1.2 R214.1 U3.32
GPIO13: NTC4.2 R214.4 U3.27
GPIO14: NTC3.2 R214.3 U3.28
GPIO15: D37.C R213.2 U3.33
IBIAS: R141.2 U2.44
IBIAS1: R69.2 U1.44
IBIAS2: R216.2 U3.44
ICMP: R141.1 R142.2 U2.43
ICMP1: R69.1 R70.2 U1.43
ICMP2: R216.1 R217.2 U3.43
IMA: TX1.3 U2.41
IMA1: TX2.3 U1.41
IMA2: TX3.3 U3.41
IPA: TX1.1 U2.42
IPA1: TX2.1 U1.42
IPA2: TX3.1 U3.42
N$1: Q12.1 R7.1
N$2: D1.A Q12.3 R42.2
N$3: D1.C R9.2
N$4: F26.2 Q11.2 R6.1 R9.1 R42.1
N$5: Q11.1 R8.1
N$6: D2.A Q11.3 R43.2
N$7: D2.C R10.2
N$8: F27.2 Q10.2 R5.1 R10.1 R43.1
N$9: Q10.1 R12.1
N$10: D3.A Q10.3 R44.2
N$11: D3.C R13.2
N$12: F28.2 Q9.2 R11.1 R13.1 R44.1
N$13: Q9.1 R15.1
N$14: D4.A Q9.3 R45.2
N$15: D4.C R16.2
N$16: F29.2 Q8.2 R14.1 R16.1 R45.1
N$17: Q8.1 R18.1
N$18: D5.A Q8.3 R46.2
N$19: D5.C R19.2
N$20: Q6.1 R21.1
N$21: D6.A Q6.3 R48.2
N$22: D6.C R22.2
N$23: F30.2 Q7.2 R17.1 R19.1 R46.1
N$24: Q7.1 R24.1
N$25: D7.A Q7.3 R47.2
N$26: D7.C R25.2
N$27: F31.2 Q6.2 R23.1 R25.1 R47.1
N$28: F32.2 Q5.2 R20.1 R22.1 R48.1
N$29: Q5.1 R27.1
N$30: D9.A Q5.3 R49.2
N$31: D9.C R28.2
N$32: F33.2 Q4.2 R26.1 R28.1 R49.1
N$33: Q4.1 R30.1
N$34: D10.A Q4.3 R50.2
N$35: D10.C R31.2
N$36: F34.2 Q2.2 R29.1 R31.1 R50.1
N$37: Q2.1 R33.1
N$38: D11.A Q2.3 R51.2
N$39: D11.C R34.2
N$40: F35.2 Q1.2 R32.1 R34.1 R51.1
N$41: Q1.1 R36.1
N$42: D12.A Q1.3 R52.2
N$43: D12.C R37.2
N$44: Q3.1 R39.1
N$45: D13.C R40.2
N$46: F25.2 Q12.2 R2.1 R3.1 R4.1
N$47: D13.A Q3.3 R53.2
N$48: R38.1 R40.1 R41.1 R53.1 U$1.1
N$49: F36.2 Q3.2 R35.1 R37.1 R52.1
N$50: C2.1 R2.2 U$30.P$2
N$52: Q13.3 R67.5 R67.6 R67.7 R67.8
N$53: Q13.1 R66.1 R68.1
N$55: Q25.1 R154.1
N$56: D25.A Q25.3 R1.2
N$57: D25.C R156.2
N$58: F2.2 Q24.2 R1.1 R153.1 R156.1
N$59: Q24.1 R155.1
N$60: D26.A Q24.3 R148.2
N$61: D26.C R157.2
N$62: F3.2 Q23.2 R148.1 R152.1 R157.1
N$63: Q23.1 R159.1
N$64: D27.A Q23.3 R189.2
N$65: D27.C R160.2
N$66: F4.2 Q22.2 R158.1 R160.1 R189.1
N$67: Q22.1 R162.1
N$68: D28.A Q22.3 R190.2
N$69: D28.C R163.2
N$70: F5.2 Q21.2 R161.1 R163.1 R190.1
N$71: Q21.1 R165.1
N$72: D29.A Q21.3 R191.2
N$73: D29.C R166.2
N$74: Q19.1 R168.1
N$75: D30.A Q19.3 R193.2
N$76: D30.C R169.2
N$77: F6.2 Q20.2 R164.1 R166.1 R191.1
N$78: Q20.1 R171.1
N$79: D31.A Q20.3 R192.2
N$80: D31.C R172.2
N$81: F7.2 Q19.2 R170.1 R172.1 R192.1
N$82: F8.2 Q18.2 R167.1 R169.1 R193.1
N$83: Q18.1 R174.1
N$84: D32.A Q18.3 R194.2
N$85: D32.C R175.2
N$86: F9.2 Q17.2 R173.1 R175.1 R194.1
N$87: Q17.1 R177.1
N$88: D33.A Q17.3 R195.2
N$89: D33.C R178.2
N$90: F10.2 Q15.2 R176.1 R178.1 R195.1
N$91: Q15.1 R180.1
N$92: D34.A Q15.3 R196.2
N$93: D34.C R181.2
N$94: F11.2 Q14.2 R179.1 R181.1 R196.1
N$95: Q14.1 R183.1
N$96: D35.A Q14.3 R197.2
N$97: D35.C R184.2
N$98: Q16.1 R186.1
N$99: D36.C R187.2
N$100: F1.2 Q25.2 R149.1 R150.1 R151.1
N$101: D36.A Q16.3 R198.2
N$102: Q38.1 R79.1
N$103: D8.A Q38.3 R114.2
N$104: D8.C R81.2
N$105: R185.1 R187.1 R188.1 R198.1 U$14.1
N$106: F12.2 Q16.2 R182.1 R184.1 R197.1
N$107: C64.1 R149.2 U$28.P$2
N$108: F14.2 Q37.2 R78.1 R81.1 R114.1
N$109: D37.A R54.1
N$110: Q37.1 R80.1
N$111: D14.A Q37.3 R115.2
N$112: D14.C R82.2
N$113: F15.2 Q36.2 R77.1 R82.1 R115.1
N$114: Q26.3 R214.5 R214.6 R214.7 R214.8
N$115: Q36.1 R84.1
N$116: D15.A Q36.3 R116.2
N$117: D15.C R85.2
N$118: F16.2 Q35.2 R83.1 R85.1 R116.1
N$119: Q26.1 R213.1 R215.1
N$120: D38.A R55.1
N$121: Q35.1 R87.1
N$122: D16.A Q35.3 R117.2
N$123: D16.C R88.2
N$124: F17.2 Q34.2 R86.1 R88.1 R117.1
N$125: J3.2 J4.2 TX1.6 TX2.6 TX3.6
N$126: Q34.1 R90.1
N$127: D17.A Q34.3 R118.2
N$128: D17.C R91.2
N$129: J3.1 J4.1 TX1.4 TX2.4 TX3.4
N$130: Q32.1 R93.1
N$131: D18.A Q32.3 R120.2
N$132: D18.C R94.2
N$133: C90.1 U3.35
N$134: F18.2 Q33.2 R89.1 R91.1 R118.1
N$135: C30.1 U1.35
N$136: Q33.1 R96.1
N$137: D19.A Q33.3 R119.2
N$138: D19.C R97.2
N$139: F19.2 Q32.2 R95.1 R97.1 R119.1
N$140: D39.A R56.1
N$142: F20.2 Q31.2 R92.1 R94.1 R120.1
N$144: Q31.1 R99.1
N$145: D20.A Q31.3 R121.2
N$146: D20.C R100.2
N$147: F21.2 Q30.2 R98.1 R100.1 R121.1
N$149: Q30.1 R102.1
N$150: D21.A Q30.3 R122.2
N$151: D21.C R103.2
N$152: F22.2 Q28.2 R101.1 R103.1 R122.1
N$154: Q28.1 R105.1
N$155: D22.A Q28.3 R123.2
N$156: D22.C R106.2
N$159: F23.2 Q27.2 R104.1 R106.1 R123.1
N$161: Q27.1 R108.1
N$162: D23.A Q27.3 R124.2
N$163: D23.C R109.2
N$165: Q29.1 R111.1
N$166: D24.C R112.2
N$170: F13.2 Q38.2 R74.1 R75.1 R76.1
N$175: D24.A Q29.3 R125.2
N$176: R110.1 R112.1 R113.1 R125.1 U$40.1
N$177: F24.2 Q29.2 R107.1 R109.1 R124.1
N$178: C21.1 R74.2 U$29.P$2
N$192: Q39.3 R139.5 R139.6 R139.7 R139.8
N$193: Q39.1 R138.1 R140.1
N$262: F12.1 U$15.1
N$264: F11.1 U$16.1
N$286: F10.1 U$17.1
N$287: F9.1 U$18.1
N$288: F8.1 U$19.1
N$289: F7.1 U$20.1
N$290: F6.1 U$21.1
N$291: F5.1 U$22.1
N$292: F4.1 U$23.1
N$293: F3.1 U$24.1
N$294: F2.1 U$25.1
N$295: F1.1 U$26.1
N$296: F24.1 U$41.1
N$297: F23.1 U$42.1
N$298: F22.1 U$43.1
N$299: F21.1 U$44.1
N$300: F20.1 U$45.1
N$301: F19.1 U$46.1
N$302: F18.1 U$47.1
N$303: F17.1 U$48.1
N$304: F16.1 U$49.1
N$305: F15.1 U$50.1
N$306: F14.1 U$51.1
N$307: F13.1 U$52.1
N$308: F36.1 U$2.1
N$309: F35.1 U$3.1
N$310: F34.1 U$4.1
N$311: F33.1 U$5.1
N$312: F32.1 U$6.1
N$313: F31.1 U$7.1
N$314: F30.1 U$8.1
N$315: F29.1 U$9.1
N$316: F28.1 U$10.1
N$317: F27.1 U$11.1
N$318: F26.1 U$12.1
N$319: F25.1 U$13.1
S1: R111.2 U2.25
S2: R108.2 U2.23
S3: R105.2 U2.21
S4: R102.2 U2.19
S5: R99.2 U2.17
S6: R93.2 U2.15
S7: R96.2 U2.13
S8: R90.2 U2.11
S9: R87.2 U2.9
S10: R84.2 U2.7
S11: R80.2 U2.5
S12: R79.2 U2.3
S13: R7.2 U1.3
S14: R8.2 U1.5
S15: R12.2 U1.7
S16: R15.2 U1.9
S17: R18.2 U1.11
S18: R21.2 U1.15
S19: R24.2 U1.13
S20: R27.2 U1.17
S21: R30.2 U1.19
S22: R33.2 U1.21
S23: R36.2 U1.23
S24: R39.2 U1.25
S25: R154.2 U3.3
S26: R155.2 U3.5
S27: R159.2 U3.7
S28: R162.2 U3.9
S29: R165.2 U3.11
S30: R168.2 U3.15
S31: R171.2 U3.13
S32: R174.2 U3.17
S33: R177.2 U3.19
S34: R180.2 U3.21
S35: R183.2 U3.23
S36: R186.2 U3.25
SWTEN: SJ10.1 U2.36
SWTEN1: SJ5.1 U1.36
SWTEN2: SJ15.1 U3.36
V+: C20.1 R75.2 U2.1
V+1: C1.1 R3.2 U1.1
V+2: C63.1 R150.2 U3.1
VREF1: C58.1 U2.35
VREF2: C59.1 Q39.2 R140.2 U2.34
VREF4: C31.1 Q13.2 R68.2 U1.34
VREF6: C91.1 Q26.2 R215.2 U3.34
VREG: C60.1 C61.1 R55.2 SJ6.1 SJ7.1 SJ8.1 SJ9.1 SJ10.2 U2.37 U2.40 U$29.P$3
VREG1: C5.1 C32.1 R56.2 SJ1.1 SJ2.1 SJ3.1 SJ4.1 SJ5.2 U1.37 U1.40 U$30.P$3
VREG2: C92.1 C93.1 R54.2 SJ11.1 SJ12.1 SJ13.1 SJ14.1 SJ15.2 U3.37 U3.40 U$28.P$3

## Tracks (layer width: path | path; a pad name or v marks a point on that pad's centre or on a via)
A0
  Top 0.178: U2.45 90.36,75.39 90.68,75.71 90.68,76.78 SJ9.2
A1
  Top 0.178: U2.46 87.55,75.89 87.76,76.09 87.76,77.87 88.01,78.12 90.55,78.12 90.68,78.25 90.68,79.32 SJ8.2
A2
  Top 0.178: U2.47 87.04,76.39 87.25,76.6 87.25,80.16 87.76,80.66 90.42,80.66 90.75,80.99 SJ7.2
A3
  Top 0.178: U2.48 86.52,76.89 86.74,77.11 86.74,82.95 87.25,83.46 90.42,83.46 90.68,83.71 90.68,84.58 SJ6.2
A4
  Top 0.178: U1.45 133.64,75.52 134.21,76.09 134.21,78.5 134.65,78.94 136.6,78.94 136.78,78.76 136.78,77.74 SJ4.2
A5
  Top 0.178: U1.46 133.43,76.02 133.73,76.32 133.73,81.07 134.21,81.55 136.53,81.55 136.73,81.35 136.73,80.28 SJ3.2
A6
  Top 0.178: U1.47 133.11,76.52 133.3,76.7 133.3,83.38 133.91,83.99 136.45,83.99 136.75,83.69 SJ2.2
A7
  Top 0.178: U1.48 132.55,77.02 132.79,77.26 132.79,85.01 134.42,86.63 136.5,86.63 136.73,86.4 136.73,85.36 SJ1.2
A8
  Top 0.178: U3.45 42.35,75.52 42.62,75.79 42.62,77.69 42.95,78.02 44.96,78.02 45.06,77.92 SJ14.2
A9
  Top 0.178: U3.46 41.86,76.02 42.14,76.29 42.14,80.16 42.7,80.71 44.86,80.71 45.06,80.51 SJ13.2
A10
  Top 0.178: U3.47 41.39,76.52 41.63,76.75 41.63,83.08 42.11,83.56 44.83,83.56 45.06,83.33 SJ12.2
A11
  Top 0.178: U3.48 41.01,77.02 41.05,77.06 41.05,85.79 41.66,86.4 44.81,86.4 45.03,86.17 45.03,84.88 SJ11.2
C0  (via drill 0.3)
  Top 0.178: U2.26 86.4,65.89 86.61,65.68 86.61,64.41 86.36,64.15 78.74,64.15 78.36,63.77 78.36,16.1 | 78.36,16.1 78.36,16.02 78.99,15.38 80.43,15.38 | 80.43,15.38 R110.2 | 80.43,15.38 80.43,16.91 C57.1 | v77.57,15.72 77.57,15.87 77.8,16.1 78.36,16.1
  Bottom 0.178: C55.2 77.94,16.08 v77.57,15.72
C1  (via drill 0.3)
  Top 0.178: U2.24 77.94,65.39 77.6,65.04 77.6,21.1 | 77.6,21.1 77.6,19.07 74.68,16.15 R107.2 | v75.95,21.1 77.6,21.1
  Bottom 0.178: C53.2 75.69,21.35 v75.95,21.1 76.24,20.81 C55.1
C2  (via drill 0.3)
  Top 0.178: U2.22 77.17,66.39 76.71,65.93 76.71,29.99 | 76.71,29.99 76.71,29.74 74.8,27.83 73.53,27.83 | 73.53,27.83 69.48,27.83 R104.2 | v75.69,29.99 76.71,29.99 | v73.53,26.18 73.53,27.83
  Bottom 0.178: C51.2 75.31,30.37 v75.69,29.99 | C53.1 75.69,25.93 75.44,26.18 v73.53,26.18
C3  (via drill 0.3)
  Top 0.178: U2.20 76.26,67.39 75.95,67.07 75.95,38.25 | 75.95,38.25 75.95,34.94 75.5,34.5 | 75.5,34.5 74.8,33.8 R101.2 | v74.93,38.25 75.95,38.25 | v74.93,35.07 75.5,34.5
  Bottom 0.178: C49.2 74.17,38.37 74.3,38.25 v74.93,38.25 | C51.1 75.31,34.69 v74.93,35.07
C4  (via drill 0.3)
  Top 0.178: U2.18 75.61,68.39 75.18,67.96 75.18,47.77 | 75.18,47.77 75.18,46.75 73.15,44.72 | 73.15,44.72 R98.2 | v74.17,47.77 75.18,47.77 | v73.28,43.71 73.28,44.59 73.15,44.72
  Bottom 0.178: C47.2 73.79,48.15 v74.17,47.77 | C49.1 74.17,43.45 73.91,43.71 v73.28,43.71
C5  (via drill 0.3)
  Top 0.178: U2.16 74.83,69.39 74.42,68.98 74.42,59.07 | 74.42,59.07 74.42,52.6 73.79,51.96 | R92.2 69.33,51.45 73.28,51.45 73.79,51.96 | v73.15,59.2 74.3,59.2 74.42,59.07 | 73.79,51.96 73.79,52.34 v73.41,52.72
  Bottom 0.178: C43.2 72.39,59.58 72.77,59.2 v73.15,59.2 | v73.41,52.72 73.41,52.6 73.91,52.09 73.91,51.29 C47.1
C6  (via drill 0.3)
  Top 0.178: U2.14 74.05,70.39 73.66,70 73.66,66.44 | 73.66,66.44 73.66,63.65 73.15,63.14 72.26,63.14 | 69.18,63.65 R95.2 69.43,63.14 72.26,63.14 | v72.14,63.65 72.14,63.26 72.26,63.14 | 73.66,66.44 73.53,66.31 v73.03,66.31
  Bottom 0.178: C43.1 72.39,63.39 v72.14,63.65 | v73.03,66.31 72.64,66.31 72.39,66.57 72.39,67.7 C45.2
C7  (via drill 0.3)
  Top 0.178: U2.12 73.28,71.39 73.15,71.27 | 73.15,71.27 72.9,71.01 72.9,69.87 71.88,68.98 69.18,68.98 R89.2 | v71.88,74.57 71.88,72.53 73.15,71.27
  Bottom 0.178: C41.2 v71.88,74.57 72.64,73.81 C45.1
C8  (via drill 0.3)
  Top 0.178: U2.10 73.68,72.39 73.41,72.66 73.41,78.89 73.34,78.95 | 73.34,78.95 72.01,80.28 | 72.01,80.28 69.61,80.28 R86.2 | v72.26,81.68 72.26,80.66 72.01,80.41 72.01,80.28 | v71.88,78.89 73.28,78.89 73.34,78.95
  Bottom 0.178: C39.2 v72.26,81.68 | C41.1 71.88,77.36 72.01,77.23 72.01,78.76 v71.88,78.89
C9  (via drill 0.3)
  Top 0.178: U2.8 74.59,73.39 74.3,73.68 74.3,84.98 73.28,86 73.15,86 | 73.15,86 72.39,86 | 72.39,86 R83.2 | v73.66,91.33 73.66,86.5 73.15,86 | v72.39,87.14 72.39,86
  Bottom 0.178: C37.2 73.53,91.46 v73.66,91.33 | C39.1 72.26,87.01 v72.39,87.14
C10  (via drill 0.3)
  Top 0.178: U2.6 75.24,74.39 75.06,74.57 75.06,96.28 73.91,97.43 73.79,97.43 | 73.79,97.43 73.66,97.43 | 73.66,97.43 69.56,97.43 R77.2 | v73.66,96.28 73.66,97.43 | v73.91,99.84 73.91,97.55 73.79,97.43
  Bottom 0.178: C37.1 73.53,96.16 v73.66,96.28
  Bottom 0.254: C34.2 v73.91,99.84
C11  (via drill 0.3)
  Top 0.178: U2.4 76.14,75.39 75.82,75.71 75.82,102.25 73.91,104.16 | 73.91,104.16 69.56,104.16 R78.2 | v74.04,105.43 74.04,104.28 73.91,104.16
  Bottom 0.178: C34.1 73.91,105.3 v74.04,105.43 74.17,105.56 74.17,107.46 74.3,107.59 C33.2
C12  (via drill 0.3)
  Top 0.178: U2.2 76.79,76.39 76.58,76.6 76.58,105.43 79.12,107.97 79.12,108.35 | 79.12,108.35 79.12,111.14 78.87,111.4 R76.2 | v79.25,108.22 79.12,108.35
  Bottom 0.178: C33.1 78.61,107.59 v79.25,108.22
C13  (via drill 0.3)
  Top 0.178: R4.2 124.66,110.97 125.55,110.08 125.55,107.26 | 125.55,107.26 125.55,106.34 123.7,104.49 123.7,78.28 123.04,77.61 123.04,76.65 123.17,76.52 U1.2 | v124.51,107.21 125.5,107.21 125.55,107.26
  Bottom 0.178: C3.1 124.28,106.11 124.51,106.34 v124.51,107.21
C14  (via drill 0.3)
  Top 0.178: R6.2 121.54,100.68 | 121.54,100.68 122.3,100.68 122.94,100.04 122.94,78.66 122.28,78 122.28,76.07 122.81,75.53 124.17,75.53 U1.4 | v121.51,103.24 121.51,100.7 121.54,100.68
  Bottom 0.178: C4.1 121.54,103.22 v121.51,103.24 121.53,103.26 C3.2
C15  (via drill 0.3)
  Top 0.178: R11.2 119.18,86.12 | 119.18,86.12 120.5,86.12 121.39,85.23 121.39,79.32 120.68,78.61 120.68,75.41 122.58,73.5 124.17,73.5 U1.8 | v119.13,86.99 119.13,86.17 119.18,86.12
  Bottom 0.178: C9.1 119.02,86.89 v119.13,86.99 119.1,87.01 C7.2
C16  (via drill 0.3)
  Top 0.178: U1.12 119.43,71.52 118.91,71 | 118.91,71 116.74,68.83 115.56,68.83 R17.2 | v118.8,71.82 118.8,71.11 118.91,71
  Bottom 0.178: C15.1 118.82,71.8 v118.8,71.82 118.75,71.88 C11.2
C17  (via drill 0.3)
  Top 0.178: U1.14 120.13,70.52 117.07,67.45 117.07,65.17 | 117.07,65.17 117.07,62.68 116.74,62.35 115.81,62.35 R23.2 | v116.21,65.14 117.04,65.14 117.07,65.17
  Top 0.254: v116.76,61.31 115.95,61.31 115.85,61.41 115.85,62.31 R23.2
  Bottom 0.178: C15.2 118.82,66.06 118.34,65.58 116.64,65.58 v116.21,65.14
  Bottom 0.254: C13.1 116.38,60.93 v116.76,61.31
C18  (via drill 0.3)
  Top 0.178: U1.16 120.5,69.52 118.03,67.05 118.03,56.05 118.03,52.06 117.72,51.74 117.32,51.35 115.21,51.35 115.11,51.45 115.11,51.25 115.14,51.22 115.12,51.22 R20.2
  Top 0.254: v116.71,56.08 118.01,56.08 118.03,56.05 | v117.35,52.24 117.35,52.11 117.72,51.74
  Bottom 0.254: C13.2 116.38,56.41 v116.71,56.08 | C17.1 117.7,51.88 v117.35,52.24
C19  (via drill 0.3)
  Top 0.178: U1.20 121.29,67.52 119.94,66.16 119.94,37.66 119.94,35.83 119.3,35.2 | v119.24,35.13 118.03,33.93 R29.2
  Top 0.254: v119.05,37.59 119.86,37.59 119.94,37.66 | v119.24,35.13 119.3,35.2
  Bottom 0.254: C19.2 118.92,37.71 v119.05,37.59 | C23.1 119.53,34.84 v119.24,35.13
C20  (via drill 0.3)
  Top 0.178: U1.22 121.69,66.52 120.9,65.73 120.9,30.35 120.42,29.86 | v120.16,29.6 117.88,27.32 117.75,27.32 R32.2
  Top 0.254: v120.16,29.6 120.42,29.86 | v118.8,26.31 118.77,26.31 117.75,27.32
  Bottom 0.254: C23.2 119.53,30.22 v120.16,29.6 | C25.1 120.34,25.77 120.04,26.08 119.02,26.08 v118.8,26.31
C21  (via drill 0.3)
  Top 0.178: U1.24 122.16,65.52 121.9,65.25 121.9,20.57 121.9,17.14 121.27,16.52 | v121.32,16.62 118.72,13.96 116.32,13.96 R35.2
  Top 0.254: v120.17,20.62 121.84,20.62 121.9,20.57 | v121.32,16.62 121.27,16.52
  Bottom 0.254: C25.2 120.34,20.8 v120.17,20.62 | C27.1 121.58,16.31 v121.32,16.62
C22  (via drill 0.3)
  Top 0.178: R5.2 v121.34,95.52 121.62,95.52 122.17,94.96 122.17,78.99 121.49,78.3 121.49,75.69 122.66,74.52 U1.6
  Top 0.254: v121.28,98.44 121.28,95.57 v121.34,95.52
  Bottom 0.178: C7.1 119.1,95.14 119.48,95.52 v121.34,95.52
  Bottom 0.254: C4.2 121.54,98.7 v121.28,98.44
C23  (via drill 0.3)
  Top 0.178: R38.2 123.41,14.89 122.83,15.46 122.83,63.72 123.34,64.23 131.72,64.23 132.33,64.84 132.33,65.88 132.21,66.01 U1.26
  Top 0.254: v124.71,16.17 125.15,16.17 125.55,15.77 125.55,14.94 R38.2
  Bottom 0.254: C29.1 123.28,18 C27.2 124.48,15.38 124.71,15.61 v124.71,16.17
C24  (via drill 0.3)
  Top 0.178: U1.18 120.87,68.52 118.97,66.62 118.97,46.58 118.64,46.25 117.3,44.9 116.79,44.9 115.2,44.9 R26.2
  Top 0.254: v118.03,46.93 118.03,46.86 118.64,46.25 | v116.81,43.76 116.81,44.87 116.79,44.9
  Bottom 0.254: C17.2 117.7,47.26 v118.03,46.93 | C19.1 118.92,43.22 118.59,43.55 117.02,43.55 v116.81,43.76
C25  (via drill 0.3)
  Top 0.178: R14.2 118.44,78.89 | 118.44,78.89 119.05,78.89 | 119.05,78.89 119.89,78.05 119.89,75.1 122.48,72.51 U1.10 | v118.42,77.87 118.42,78.86 118.44,78.89 | v119,81.27 119,78.94 119.05,78.89
  Bottom 0.178: C11.1 118.75,77.54 v118.42,77.87 | C9.2 119.02,81.5 v119,81.27
C26  (via drill 0.3)
  Top 0.178: U3.2 31.66,76.52 31.3,76.87 31.3,101.4 31.93,102.02 32.82,102.02 33.53,102.74 33.53,102.91 | 33.53,102.91 33.53,105.06 R151.2 | v33.88,102.56 33.53,102.91
  Bottom 0.178: C65.1 33.73,102.71 v33.88,102.56
C27  (via drill 0.3)
  Top 0.178: U3.4 30.7,75.52 30.42,75.89 30.42,100.69 v29.97,101.13 29.71,101.4 29.62,101.49 23.79,101.49 R153.2
  Bottom 0.178: C65.2 29.77,102.71 29.62,102.56 29.62,101.49 v29.97,101.13 29.79,100.96 29.79,99.89 29.59,99.69 C66.1
C28  (via drill 0.3)
  Top 0.178: U3.8 28.88,73.52 28.64,73.75 28.64,85.93 28.19,86.38 27.48,86.38 | 27.48,86.38 24.32,86.38 R158.2 | v27.66,87.62 27.66,86.56 27.48,86.38
  Bottom 0.178: C71.1 27.51,87.47 v27.66,87.62 27.69,87.65 C69.2
C29  (via drill 0.3)
  Top 0.178: U3.12 27.82,71.52 27.57,71.27 27.57,69.84 | 27.57,69.84 27.57,69.49 26.89,68.8 R164.2 | v26.77,69.84 27.57,69.84
  Bottom 0.178: C77.1 26.62,69.69 v26.77,69.84 27.51,70.58 C73.2
C30  (via drill 0.3)
  Top 0.178: U3.14 28.78,70.52 28.46,70.2 28.46,65.75 27.22,64.51 26.77,64.51 | R170.2 26.77,64.51 | v26.77,65.4 26.77,64.51 | v26.65,62.22 26.65,64.38 26.77,64.51
  Bottom 0.178: C77.2 26.62,65.55 v26.77,65.4 | C75.1 v26.65,62.22
C31  (via drill 0.3)
  Top 0.178: U3.16 29.73,69.52 29.35,69.13 29.35,57.75 29.26,57.66 | R167.2 28.35,51.5 29.26,52.42 29.26,53.31 | 29.26,53.31 29.26,57.66 | v28.19,53.31 29.26,53.31 | v26.92,57.83 29.1,57.83 29.26,57.66
  Bottom 0.178: C79.1 28.4,53.1 v28.19,53.31 | C75.2 26.65,58.11 v26.92,57.83
C32  (via drill 0.3)
  Top 0.178: U3.20 31.2,67.52 31.04,67.35 31.04,36.06 30.68,35.7 | R176.2 28.88,33.9 30.68,35.7 | v29.97,36.24 30.15,36.24 30.68,35.7
  Bottom 0.178: C83.1 30.25,35.96 v29.97,36.24 29.46,36.75 C81.2
C33  (via drill 0.3)
  Top 0.178: U3.22 31.98,66.52 31.75,66.29 31.75,30.9 | 31.75,30.9 31.75,29.66 29.52,27.42 v25.53,27.42 23.93,27.42 R179.2 | v30.51,31.08 31.57,31.08 31.75,30.9
  Bottom 0.178: C83.2 30.25,31.34 v30.51,31.08 | C85.1 25.85,27.11 v25.53,27.42
C34  (via drill 0.3)
  Top 0.178: U3.24 32.76,65.52 32.46,65.22 32.46,28.06 29.08,24.68 29.08,23.97 | R182.2 27.48,14.19 29.08,15.79 29.08,17.57 | 29.08,17.57 29.08,23.97 | v27.84,23.97 29.08,23.97 | v28.19,17.39 28.91,17.39 29.08,17.57
  Bottom 0.178: C85.2 27.55,24.26 v27.84,23.97 | C87.1 28.22,17.42 v28.19,17.39
C35  (via drill 0.3)
  Top 0.178: U3.6 29.83,74.52 29.53,74.82 29.53,95.18 29.08,95.62 v27.48,95.62 26.59,95.62 26.24,95.98 26.24,97.06 R152.2
  Top 0.254: R152.2 26.1,97.97 25.88,98.19 24.84,98.19 v24.61,98.42
  Bottom 0.178: C69.1 27.69,95.42 v27.48,95.62
  Bottom 0.254: v24.61,98.42 24.61,99.41 24.94,99.74 27.01,99.74 C66.2
C36  (via drill 0.5)
  Top 0.178: U3.26 40.56,66.01 41.5,66.01 41.71,65.77 41.71,65.22 41.53,65.04 38.86,65.04 38.33,64.51 33.35,64.51 33.17,64.33 33.17,17.39 v33.35,17.21 34.77,17.21 34.98,17.01 R185.2
  Bottom 0.178: C87.2 33.15,17.42 v33.35,17.21 33.41,17.15 C89.1
C37  (via drill 0.3)
  Top 0.178: U3.18 30.51,68.52 30.24,68.24 30.24,51.35 30.15,51.26 30.15,48.51 | R173.2 29.26,44.52 | 29.26,44.52 29.9,44.52 30.15,44.77 30.15,48.51 | v28.73,48.51 30.15,48.51 | v29.26,43.53 29.26,44.52
  Bottom 0.178: C79.2 28.4,48.84 v28.73,48.51 | C81.1 29.46,43.33 v29.26,43.53
C38  (via drill 0.3)
  Top 0.178: U3.10 28.01,72.52 27.83,72.7 27.83,78.56 | 27.83,78.56 27.83,79.28 27.3,79.8 | 27.3,79.8 23.99,79.8 R161.2 | v26.95,78.56 27.83,78.56 | v27.3,81.58 27.3,79.8
  Bottom 0.178: C73.1 27.51,78 v26.95,78.56 | C71.2 27.51,81.78 v27.3,81.58
DRIVE  (via drill 0.3)
  Top 0.178: U$29.P$1 86.87,89.68 86.49,89.3 86.49,84.65 v86.56,84.58 | v87,72.05 86.84,71.9 85.48,71.9 U2.38
  Bottom 0.178: v86.56,84.58 86.56,72.48 v87,72.05
DRIVE1  (via drill 0.3)
  Top 0.178: U$30.P$1 134.62,88.08 v132,85.46 | v132.51,72.31 132.16,72 131.04,72 U1.38
  Bottom 0.178: v132,85.46 132,72.81 v132.51,72.31
DRIVE2  (via drill 0.3, 0.5)
  Top 0.178: U3.38 41.85,72.02 v42.06,72.23 | v40.95,87.24 41,90.59 U$28.P$1
  Bottom 0.178: v40.95,87.24 40.97,85.62 41.02,74.44 42.06,73.22 v42.06,72.23
GND  (via drill 0.3, 0.5, 0.6)
  Top 0.178: v38.86,67.07 39.04,68.24 39.4,68.6 40.42,68.6 U3.31
  other vias: 41.94,45.5 22.5,107.89 28.19,116.43 9.88,100.25 15.04,90.65 9.88,92.78 13.61,83.18 13.97,74.47 10.06,77.67 25.17,111.98 37.08,101.31 11.84,39.26 11.13,69.84 14.5,59 10.24,62.91 27.3,46.91 14.5,54.02 14.5,45.48 13.61,31.08 24.46,39.79 14.68,21.13 47.32,74.97 46.53,69.49 48.11,52.29
  pour Top (rank 4): -2.54,130.95 49.53,130.95 49.53,-6.2 -2.54,-6.2
  pour Bottom: -2.54,129.69 49.53,129.69 49.53,-7.47 -2.54,-7.47
GNDA  (via drill 0.5)
  other vias: 90.02,61.89 80.29,35.53 83.31,41.75 74.24,18.99 93.32,78.28 78,81.3 94.62,73.84 65.99,6.93 77.67,14.17 75.64,9.21 76.4,7.94 62.31,12.9 62.56,17.59 72.47,30.04 73.36,37.28 72.47,47.31 62.56,38.68 61.16,53.79 67.77,59 65.86,74.62 63.45,70.3 63.58,82.49 60.78,75.89 72.47,91.76 61.54,91.25 71.58,99.89
  pour Top (rank 6): 52.07,130.95 52.07,-6.2 95.25,-6.2 95.25,130.95
  pour Bottom (rank 6): 52.07,129.69 52.07,-7.47 95.25,-7.47 95.25,129.69
GNDI  (via drill 0.5)
  Top 0.178: U1.31 U1.30
  other vias: 140.89,76.09 127.05,86.66 115.98,91.41 109.37,81.88 110.24,74.54 109.07,69.72 110.92,64.81 111.71,57.8 108.84,53.54 113.84,47.06 114.33,40.28 108.76,38.12 115.09,29.66 115.54,22.45 103.07,19.27 127.74,111.09 99.14,111.52 102.29,106.72 119.43,104.44 121.46,122.27 100.23,122.04
  pour Top (rank 4): 97.79,129.69 97.79,-3.67 137.16,-3.67 137.16,26.81 142.24,31.89 142.24,57.3 140.97,58.56 140.97,130.19
  pour Bottom: 97.79,-2.39 97.79,128.42 140.97,129.05 140.97,58.56 142.24,57.3 142.24,31.89 137.16,26.81 137.16,-3.67
GPIO1
  Top 0.178: U2.27 86.67,66.39 87.12,65.93 87.12,54.25 | R139.4 87.61,53.76 87.12,54.25 | NTC8.2 84.2,20.06 85.88,21.73 85.88,53.61 86.51,54.25 87.12,54.25
GPIO2  (via drill 0.3)
  Top 0.178: U2.28 86.8,66.89 87.5,66.19 87.5,55.26 88.16,54.61 v88.24,54.61 88.39,54.61 R139.3
  Bottom 0.178: NTC7.2 84.02,55.44 84.25,55.67 87.18,55.67 v88.24,54.61
GPIO3  (via drill 0.3)
  Top 0.178: R139.2 88.63,55.41 87.88,56.15 87.88,66.57 87.06,67.39 U2.29 84.15,67.38 v84.07,67.3
  Bottom 0.178: NTC6.2 85.16,107.45 85.7,106.9 85.7,67.62 U2.29 84.16,67.39 v84.07,67.3
GPIO4  (via drill 0.3)
  Top 0.178: R139.1 88.92,56.26 88.39,56.79 88.39,66.95 86.45,68.89 U2.32 v83.8,68.88
  Bottom 0.178: NTC5.2 84.95,89.92 85.27,89.6 85.27,69.26 84.91,68.9 83.82,68.9 v83.8,68.88
GPIO5  (via drill 0.3)
  Top 0.178: U2.33 86.59,69.39 88.9,67.07 88.9,59.58 89.34,59.14 | R138.2 93.38,65.04 93.47,65.04 93.6,65.17 94.49,65.17 94.87,64.79 94.87,59.96 94.36,59.45 93.47,59.45 93.09,59.07 89.41,59.07 89.34,59.14 | D38.C 85.84,57.28 v85.65,57.09 | v89.26,57.45 89.26,59.05 89.34,59.14
  Bottom 0.178: v85.65,57.09 88.9,57.09 v89.26,57.45
GPIO6  (via drill 0.3)
  Top 0.178: R67.2 135.99,50.23 135.13,50.23 134.47,50.89 134.47,67.23 134.18,67.52 U1.29 129.72,67.51 v129.51,67.3
  Bottom 0.178: NTC10.2 131.05,89.94 130.73,89.63 130.73,67.89 130.35,67.51 129.72,67.51 v129.51,67.3
GPIO7  (via drill 0.3)
  Top 0.178: R67.1 135.99,51.12 135.25,51.12 134.87,51.5 134.87,68.6 134.46,69.02 U1.32 129.6,69.02 v129.26,68.67
  Bottom 0.178: NTC9.2 133.42,107.47 133.78,107.1 133.78,103.88 131.06,101.16 131.06,101.13 130.76,100.83 130.76,91.33 130.35,90.92 130.35,69.74 129.29,68.67 v129.26,68.67
GPIO8  (via drill 0.3)
  Top 0.178: U1.27 133.45,66.52 133.68,66.29 133.68,49.37 134.37,48.68 134.42,48.63 | 134.42,48.63 134.47,48.58 135.99,48.58 R67.4 | v134.42,47.95 134.42,48.63
  Bottom 0.178: NTC12.2 133.59,19.48 134.37,20.26 134.37,47.9 v134.42,47.95
GPIO9  (via drill 0.3)
  Top 0.178: U1.28 133.84,67.02 134.09,66.77 134.09,50.11 v134.62,49.57 134.75,49.45 R67.3
  Bottom 0.254: NTC11.2 131.7,52.69 131.7,50.06 131.98,49.78 134.42,49.78 v134.62,49.57
GPIO10
  Top 0.178: U1.33 137.11,69.52 137.54,69.08 137.54,62.6 138.05,62.1 139.36,62.1 D39.C 139.45,62.01 R66.2
GPIO11  (via drill 0.3)
  Top 0.178: R214.2 41.93,49.19 41.96,49.22 38.08,49.22 37.64,49.65 37.64,59.63 39.75,61.74 44.2,61.74 45.03,62.58 45.03,66.46 43.98,67.52 41.91,67.52 | U3.29 41.91,67.52 | v41.89,67.84 41.89,67.54 41.91,67.52
  Bottom 0.178: NTC2.2 37.45,89.87 37.14,89.55 37.14,82.87 37.54,82.47 38.94,82.47 39.37,82.03 39.37,69.06 39.62,68.8 41.35,68.8 41.66,68.5 41.66,68.06 v41.89,67.84
GPIO12  (via drill 0.3)
  Top 0.178: R214.1 40.58,50.04 40.34,50.28 40.34,60.47 41.07,61.21 44.35,61.21 45.57,62.43 45.57,66.74 43.3,69.02 43.05,69.02 | U3.32 43.05,69.02 | v42.95,68.42 42.95,68.91 43.05,69.02
  Bottom 0.178: NTC1.2 38.81,92.58 40.16,91.23 40.16,69.82 40.56,69.41 42.43,69.41 42.82,69.02 42.82,68.55 v42.95,68.42
GPIO13  (via drill 0.3)
  Top 0.178: R214.4 v39.93,47.54 37.72,47.54 36.68,48.58 36.68,59.99 39.57,62.88 43.71,62.88 43.99,63.16 43.99,65.91 43.37,66.5 43.31,66.52 U3.27
  Bottom 0.178: NTC4.2 40.6,17.74 40.87,18 40.87,46.6 v39.93,47.54
GPIO14  (via drill 0.3)
  Top 0.178: R214.3 41.84,48.35 v38.18,48.35 37.92,48.35 37.24,49.04 37.24,59.91 39.57,62.25 44.02,62.25 44.5,62.73 44.5,66.34 43.82,67.02 U3.28
  Bottom 0.178: NTC3.2 37.48,54.46 37.24,54.22 37.24,49.29 v38.18,48.35
GPIO15  (via drill 0.3)